# Altium PCB lay_out.PcbDoc
Units mil, origin at the board's own origin, x right, y up, seen from the top; angles counter-clockwise.
Board outline 1680 x 1250 mil, 2 copper layers (Top Layer, Bottom Layer); 15 components, 9 nets, 40 pads, 2 vias.
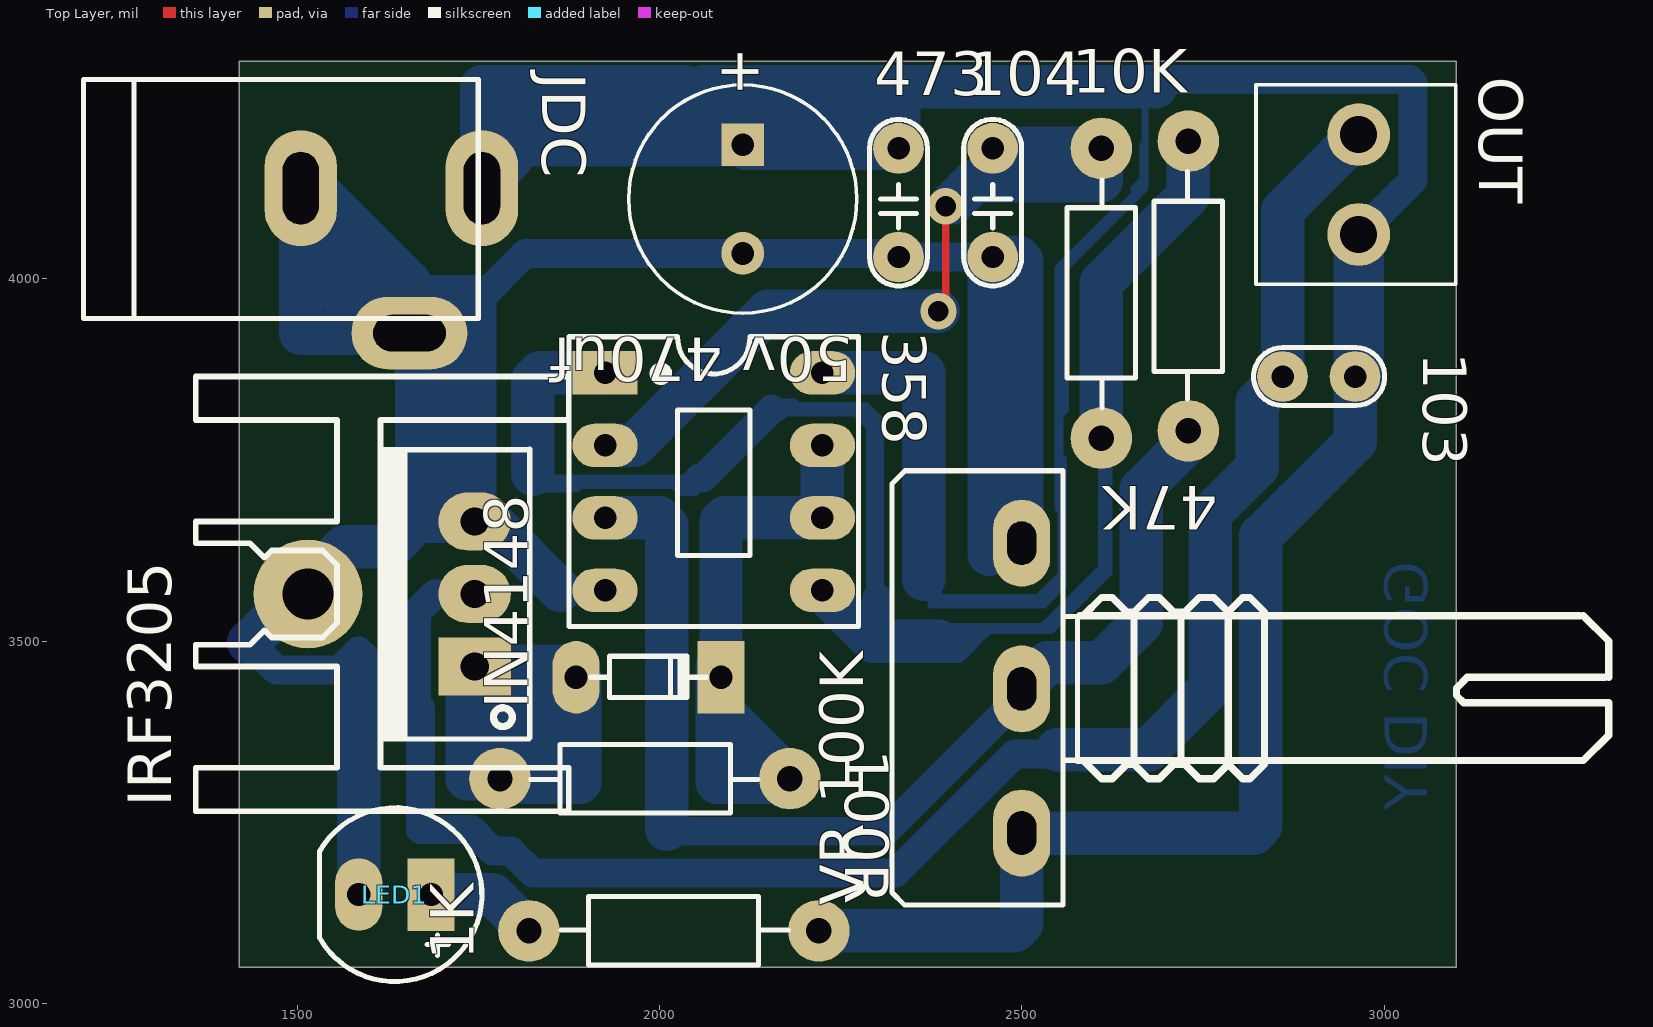
[diagram p0: Top Layer view]
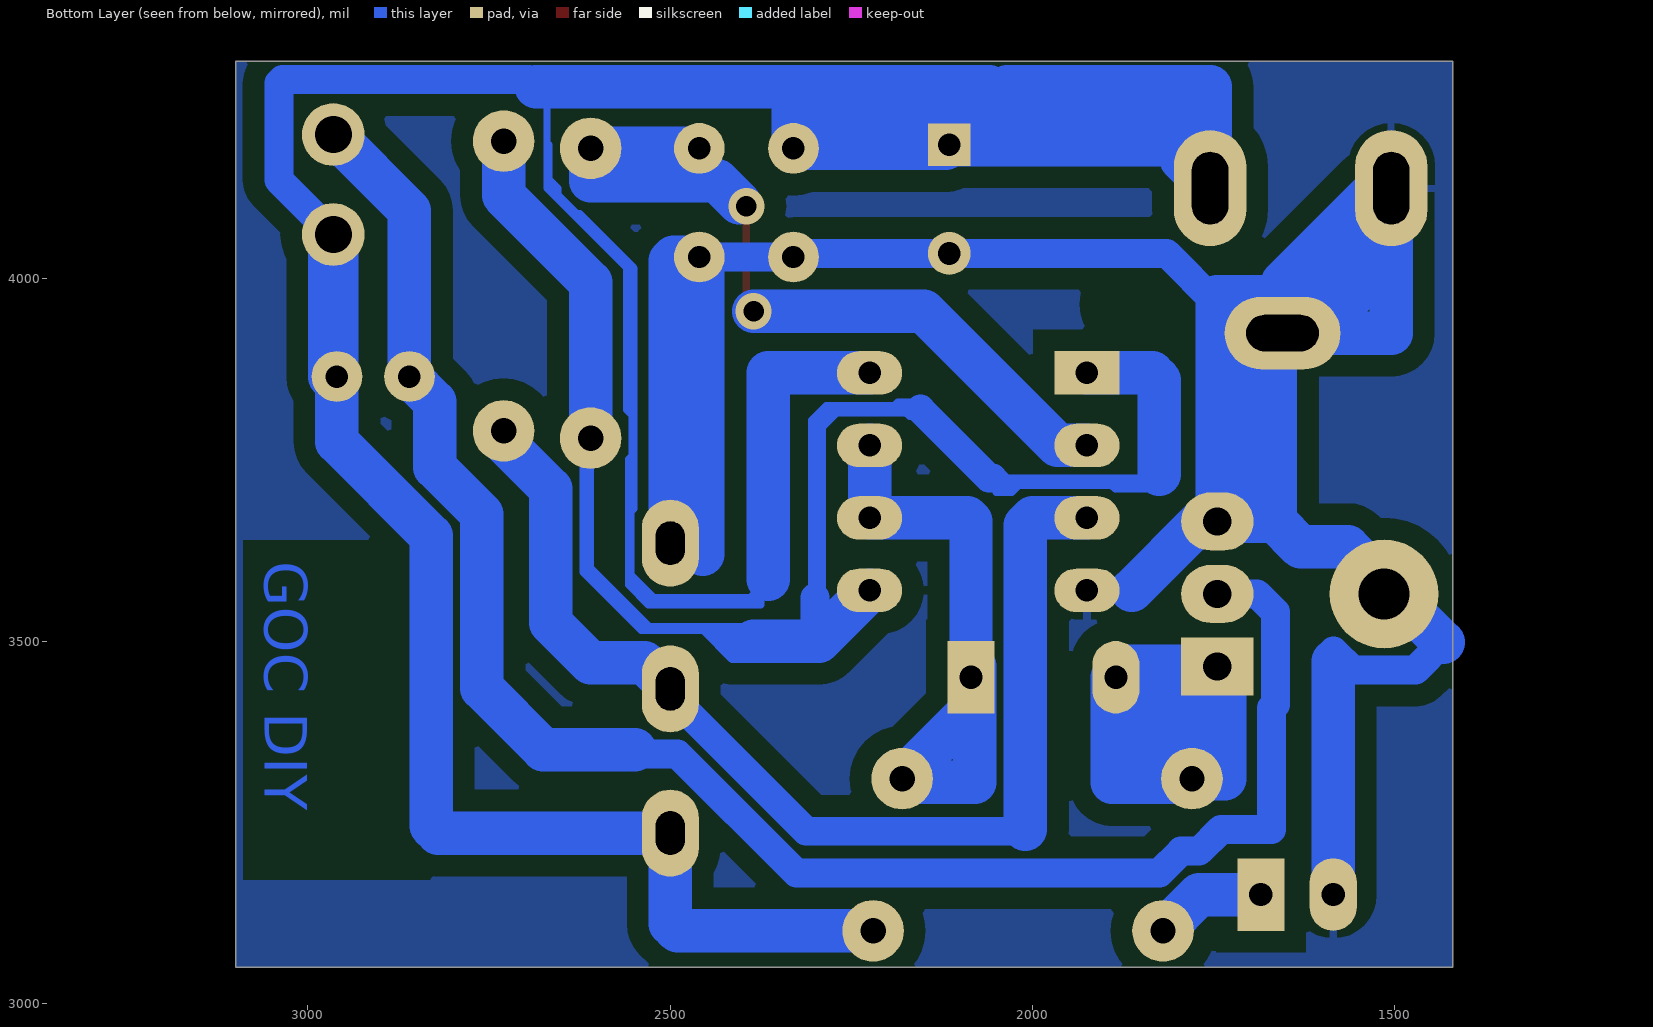
[diagram p1: Bottom Layer view, seen from below]
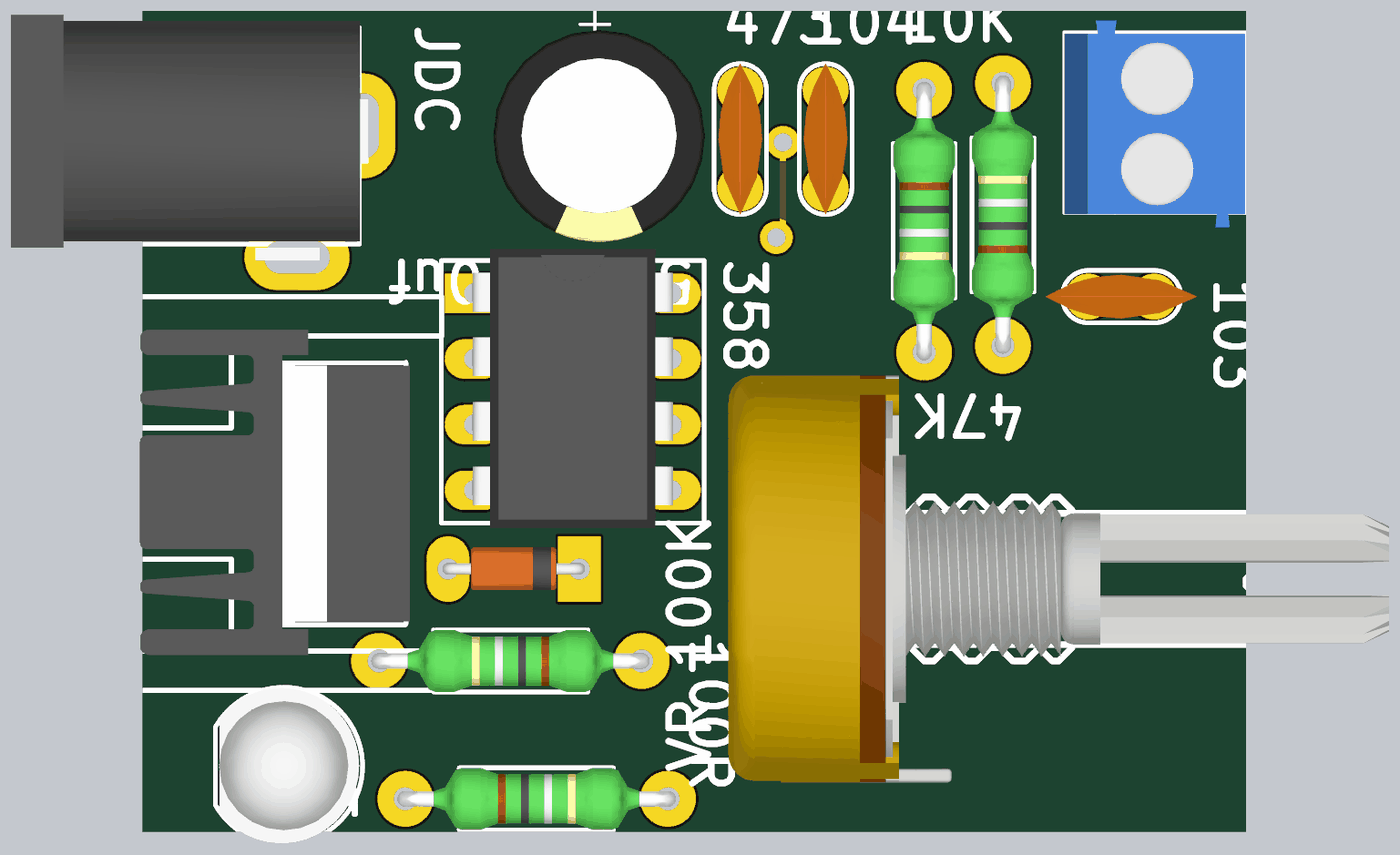
[diagram p2: 3D render of the assembled board from above, using the file's embedded part models]

## Layer stack, top to bottom
Top Solder: solder mask 0.4, Solder Resist, Dk 3.5
Top Layer: signal copper 1.4
Dielectric 1: dielectric 12.6, FR-4, Dk 4.8
Bottom Layer: signal copper 1.4
Bottom Solder: solder mask 0.4, Solder Resist, Dk 3.5

## Board outline
1420,4300 3100,4300 3100,3050 1420,3050 1420,4300

## Design rules (kind name [scope] priority, off if disabled: settings)
Clearance [All] p1: gap=30 ignorepadtopadclearanceinfootprint=FALSE except(0: Arc-Hole Track-Hole SMDPad-Hole THPad-Hole Via-Hole Fill-Hole Poly-Hole Region-Hole Text-Hole)
PolygonConnect [All] p1: connectstyle=Relief reliefconductorwidth=10 reliefentries=4 polygonreliefangle="90 Angle" airgapwidth=10
RoutingVias [All] p1: holewidth=28 width=50 viastyle="Through Hole" minholewidth=28 minwidth=50 maxholewidth=28 maxwidth=50
SolderMaskExpansion [All] p1: expansion=4
Width [All] p1: maxlimit=60 minlimit=10 preferedwidth=40
30 further rules are at their usual default settings.

## Components (designator, comment, footprint, x,y, rotation, side; value= is the part's Value field where it differs from the comment)
1K "Res" RES-1/4W 2005,3105 r180 top
10K "Res" RES-1/4W 2615,3995 r90 top
47K "Res" RES-1/4W 2725,3975 r270 top
"50v 470uf" "CN-ALU-DIP" CA-ALU-8 2115,4110 r270 top
100R "Res" RES-1/4W 1995,3305 r0 top
103 "XXpF" CN1 2910,3865 r0 top
104 "XXpF" CN1.5 2460,4100 r90 top
358 "LM358" DIP8 2075,3725 r270 top
473 "XXpF" CN1.5 2330,4100 r90 top
IN4148 "Diode" DIO-0.5A-SMALL 1985,3450 r180 top
IRF3205 "IRF9540" TO220H1 1745,3565 r90 top
JDC "Jac DC" DC0 1630,4025 r0 top
LED1 "LED" LED-5-RED 1685,3150 r180 top
OUT "KF2" KF2-3.5 2965,4130 r270 top
"VR 100K" "50K" VR-S1 2500,3435 r90 top

## Footprints (in the part's own frame and the unit in brackets; to place one, negate y for a bottom-side part, rotate by r counter-clockwise, add the part's x,y. Pads: shape width x height; smd on the part's side, far side on the other; paste and mask are expansions set on the pad)
CA-ALU-8 [mm] "Polarized capacitors, Aluminum Electrolytic Capacitors, 2-Leads, Body 8x16x3.5x0.5"
  rect 1.5x1.5 hole 0.8: 1(-1.905,0)
  round 1.5 hole 0.8: 2(1.905,0)
  silkscreen extent -4,-4 4,4, body extent -4.1,-4.1 4.1,4.1, height 14.4
CN1 [mil]
  round 70 hole 31: 1(-50,0) 2(50,0)
  silkscreen extent -90,-40 91,40, body extent -115,-33 115,33, height 265
CN1.5 [mil]
  round 70 hole 31: 1(-70,0) 2(80,0)
  silkscreen extent -110,-40 120,40, body extent -110,-33 120,33, height 235
DC0 [mil] "Jac DC input"
  oval 100x160 hole 50 slot 100 at 90 deg: 1(125,100) 2(-125,100)
  oval 160x100 hole 50 slot 100 at 0 deg: 3(25,-100)
  silkscreen extent -425,-80 120,250, body extent -410,-105 134,269, height 434
DIO-0.5A-SMALL [mil] "Diode muoi, W 80mil, L 300mil"
  oval 65x100 hole 32: 1(100,0)
  rect 65x100 hole 32: 2(-100,0)
  silkscreen extent -80,-30 80,28, body extent -108,-33 108,32, height 61
DIP8 [mil] "DIP, 8-Leads, Row Spacing 7.62mm, Pitch 2.54mm, Body 9.91x6.73mm"
  rect 60x90 hole 31: 1(-145,-150)
  oval 60x90 hole 31: 2(-45,-150) 3(55,-150) 4(155,-150) 5(155,150) 6(55,150) 7(-45,150) 8(-145,150)
  silkscreen extent -195,-200 205,200, body extent -213,-153 213,153, height 177
KF2-3.5 [mm] "3,50mm - modular - blue - Horizontal wire entry - Pressure clamp - 8,4mm height - 02p"
  round 2.2 hole 1.3: 1(-1.75,0) 2(1.75,0)
  silkscreen extent -3.5,-3.6 3.5,3.4, body extent -3.95,-3.6 4.05,3.4, height 8.41
LED-5-RED [mil] "LED 2 PIN, 5 ly , Only colour,pin to pin 100mil"
  rect 65x100 hole 32: 1(0,0)
  oval 65x100 hole 32: 2(100,0)
  silkscreen extent -70,-120 154,120, body extent -65,-119 149,118, height 339
RES-1/4W [mil]
  round 85 hole 35: 1(-215,5) 2(185,5)
  silkscreen extent -173,-42 141,52, body extent -227,-42 197,52, height 95
TO220H1 [mil] "TO-220 - 1-2-3"
  round 150 hole 70: 0(0,230)
  rect 80x100 hole 39: 1(-100,0)
  oval 80x100 hole 39: 2(0,0) 3(100,0)
  silkscreen extent -300,-130 300,385, body extent -246,-82 250,329, height 1000
VR-S1 [mil]
  oval 120x78.74 hole 40 slot 60 at 0 deg: 1(-200,0) 2(-1,0) 3(200,0)
  silkscreen extent -299,-810 300,179, body extent -310,-818 310,188, height 839

## Part data
"50v 470uf": "Capacitor (Semiconductor SIM Model)"
103 104 473: library part CN
358: "Low-Power Dual Operational Amplifier"
IN4148: "Default Diode"
IRF3205: "HEXFET P-Channel Power MOSFET"
JDC: library part DCIN, "Jac DC input"
LED1: "LED Single colour Green and Red"
"VR 100K": library part VR-S, "Var Resistor"

## Via types
v1: diameter 50, hole 28, Top Layer to Bottom Layer, 2 vias

## Nets (pads, with @x,y where several pads share a name; then routed paths per layer and width w, separated by ;. In a path a pad name is that pad's centre, name@x,y a point inside that pad or via, vN(x,y) a via of type N, cw(c..) or ccw(c..) an arc to the next point about the centre after c; other vN are vias at no path point)
GND: 104.1 358.4 473.1 "50v 470uf.2" "VR 100K.3" IRF3205.3 JDC.2 JDC.3 LED1.2 | length 5633
  Bottom Layer w40: 1433.25,3498.25 1471.51,3460 1558.49,3460 1585,3486.51 1585,3472.37 ; JDC.3 1695,3965 1730,3965 1745,3965 1815,4035 2115,4035 2325,4035 473.1 104.1
  Bottom Layer w60: 1433.25,3498.25 1565,3630 1630,3630 1665,3665 ; JDC.2 JDC.2@1510,4120 ; LED1.2 1585,3472.37 ; JDC.3@1695,3965 1705,3975 1655,3975 ; 1705,3705 1705,3775 ; 1863.14,3570 1768.14,3665 IRF3205.3 ; 2495,4030 104.1 ; 2500,4025 2500,3755 ; JDC.2@1510,4120 1655,3975 ; JDC.2@1510,4120 1505,4120 1505,3925 JDC.3@1610,3925 ; JDC.2@1510,4120 1530,4120 1655,3995 1655,3975 ; JDC.3@1610,3925 JDC.3 ; JDC.3@1610,3925 1545,3990 1550,3995 1550,4050 1595,4005 1595,3985 JDC.3 ; 1645,3975 1655,3975 ; 1645,3975 1625,3975 1615,3985 1635,3985 1645,3975 ; 1645,3975 JDC.3@1655,3965 ; JDC.3 JDC.3@1655,3965 ; JDC.3 JDC.3@1665,3915 ; JDC.3@1655,3965 1655,3975 ; 1655,3975 1730,3975 ; 1665,3665 IRF3205.3 ; 1665,3665 JDC.3@1665,3915 ; JDC.3@1665,3915 JDC.3@1700,3880 ; JDC.3@1700,3880 1705,3875 ; JDC.3@1700,3880 1700,3845 1705,3845 ; 1705,3775 1745,3815 ; 1705,3775 1705,3845 ; 1705,3845 1705,3875 ; 1705,3845 1715,3845 1725,3855 ; 1705,3875 1725,3855 ; 1725,3855 1745,3835 ; 1725,3855 1730,3860 1730,3965 1730,3975 ; 1730,3975 1745,3975 1745,3965 1745,3835 ; IRF3205.3 1745,3815 ; 1745,3815 1745,3835 ; 2455,3625 2455,3620 2460,3625 2490,3625 2500,3635 ; 2455,3625 2465,3635 2500,3635 ; 2455,3625 2455,4025 104.1 ; 104.1 2460,3795 2500,3755 ; 2500,3635 2500,3755
MT: 103.1 IRF3205.2 OUT.1 | length 2461.7
  Bottom Layer w40: IRF3205.2 1690,3565 1665,3540 1665,3412.57 1670,3407.57 1670,3240 1740,3240 1770,3210 1794.85,3210 1824.85,3180 2326,3180 2490,3344 2542.88,3344 2548.88,3350
  Bottom Layer w60: 2548.88,3350 2675,3350 2760,3435 2760,3675 2825,3740 2825,3830 103.1 2860,4093.9 OUT.1
Net1K_2: 1K.2 LED1.1 | length 155.7
  Bottom Layer w60: LED1.1 1770,3150 1K.2
Net10K_1: 10K.1 47K.1 358.1 358.5 | length 4916.4
  Bottom Layer w10: 1825,3730 1830,3725 2035,3725 ; 2154.93,3819.93 2159.93,3819.93 ; 2300,3560 2305,3555 2305,3805 2285,3825 2280,3825 ; 2385,3500 2400,3500 ; 2615,3600 2535,3520 2528.64,3520 ; 1840,3715 1891.36,3715 ; 1840,3715 1825,3715 1820,3710 1886.36,3710 1891.36,3715 ; 1840,3715 1845,3720 2030,3720 ; 1891.36,3715 2018.64,3715 ; 2018.64,3715 2025,3715 ; 2018.64,3715 2028.64,3705 2050,3705 2050,3710 2045,3715 2025,3715 ; 2025,3715 2030,3720 ; 2030,3720 2035,3725 ; 2030,3720 2050,3720 2055,3725 ; 2035,3725 2045,3735 2065,3735 ; 2035,3725 2055,3725 ; 2055,3725 2065,3735 ; 2065,3735 2070,3735 2075,3735 2155,3815 ; 2065,3735 2145,3815 2150,3815 2155,3815 ; 2155,3815 2165,3815 ; 2155,3815 2159.93,3819.93 ; 2159.93,3819.93 2160.07,3819.93 ; 2159.93,3819.93 2160,3820 ; 2160,3820 2160,3825 ; 2160,3820 2160.07,3819.93 ; 2160,3820 2155,3825 2160,3825 ; 2160,3825 2191.36,3825 ; 2160,3825 2160,3830 2186.36,3830 2191.36,3825 ; 2160.07,3819.93 2280.07,3819.93 2295,3805 ; 2160.07,3819.93 2165,3815 ; 2165,3815 2175,3815 ; 2165,3815 2170,3810 2175,3815 ; 2175,3815 2270,3815 ; 2191.36,3825 2280,3825 ; 2270,3815 2280,3815 2295,3800 ; 2270,3815 2290,3795 2290,3560 2295,3560 2295,3800 ; 2280,3825 2295,3810 2295,3805 ; 2295,3800 2295,3805 ; 2400,3475 2420,3495 ; 2400,3475 2405,3475 ; 2400,3475 2375,3475 2400,3500 ; 2400,3500 2405,3500 ; 2400,3500 2415,3515 ; 2405,3475 2415,3475 2455,3515 ; 2405,3475 2430,3500 2425,3500 ; 2405,3500 2420,3500 2425,3505 ; 2405,3500 2420,3515 ; 2405,3500 2410,3495 2420,3495 ; 2415,3515 2420,3515 ; 2415,3515 2390,3515 2395,3520 2440,3520 ; 2420,3495 2425,3500 ; 2420,3515 2430,3515 2420,3505 2425,3505 ; 2425,3500 2430,3505 ; 2425,3505 2430,3505 ; 2425,3505 2440,3520 ; 2430,3505 2435,3505 2445,3515 ; 2430,3505 2440,3515 2445,3515 ; 2440,3520 2450,3520 ; 2445,3515 2455,3515 ; 2445,3515 2450,3520 ; 2450,3520 2460,3520 ; 2455,3515 2540,3515 2620,3595 2620,3770 10K.1 2610,3601.36 2528.64,3520 ; 2455,3515 2460,3520 ; 2460,3520 2528.64,3520
  Bottom Layer w40: 2055,3725 2060,3725 2070,3735 2150,3815 2154.93,3819.93 ; 2300,3505 2300,3560
  Bottom Layer w60: 1825,3730 1825,3860 1835,3870 358.1 ; 358.5 2295,3500 2385,3500 ; 10K.1 2610,3995 2730,4115 47K.1
Net10K_2: 10K.2 104.2 358.2 | length 1098.2
  Top Layer w10: v1(2385,3955) 2395,3965 v1(2395,4100)
  Bottom Layer w60: 358.2 1965,3770 2150,3955 v1(2385,3955) ; v1@2405,4105 2435,4135 2610,4135 10K.2 104.2
Net47K_2: 47K.2 358.3 "VR 100K.2" | length 1581.5
  Bottom Layer w40: 2010,3240 2012.5,3237.5 2312.5,3237.5 2500,3425 2500,3434
  Bottom Layer w60: 358.3 2000,3670 2010,3660 2010,3240 ; 2500,3434 2536,3470 2610,3470 2665,3525 2665,3710 2730,3775 47K.2
Net100R_1: 100R.1 IN4148.1 IRF3205.1 | length 1309.6
  Bottom Layer w60: 1820,3395 1815,3390 1815,3340 1850,3340 1855,3345 1855,3380 IRF3205.1@1785,3450 ; IN4148.1 IRF3205.1@1785,3450 ; IRF3205.1 IRF3205.1@1770,3465 ; IRF3205.1 1735,3455 1735,3310 100R.1 ; IRF3205.1 1745,3345 100R.1 ; IRF3205.1@1770,3465 1875,3465 1890,3450 1890,3305 1785,3305 100R.1 ; IRF3205.1@1770,3465 IRF3205.1@1785,3450 ; 100R.1 1780,3430 1760,3450 IRF3205.1@1785,3450
Net100R_2: 100R.2 358.6 358.7 IN4148.2 | length 898.5
  Bottom Layer w60: IN4148.2@2080,3465 2080,3305 2175,3305 100R.2 2085,3405 IN4148.2 2085,3665 2090,3670 358.6 358.7
VCC: 1K.1 103.2 358.8 473.2 "50v 470uf.1" "VR 100K.1" JDC.1 OUT.2 | length 7849.4
  Bottom Layer w10: 2365,3585 2390,3560 ; 2685,4265 2670,4250 2670,4185 ; 2390,3560 2400,3550 ; 2390,3560 2375,3560 2375,3550 2400,3550 ; 2390,3560 2522.52,3560 2554.37,3591.85 ; 2400,3550 2500,3550 ; 2500,3550 2515,3550 ; 2500,3550 2505,3555 2520,3555 2515,3550 ; 2515,3550 2520,3550 ; 2520,3550 2530.36,3550 2557.68,3577.32 2557.68,3751.01 2554.37,3754.31 ; 2520,3550 2554.37,3584.37 2554.37,3591.85 ; 2552.5,3811.32 2552.5,4013.86 2628.64,4090 ; 2552.5,3811.32 2552.5,3756.18 2554.37,3754.31 ; 2552.5,3811.32 2560,3818.82 2560,4015 2670,4125 2670,4131.36 ; 2554.37,3591.85 2554.37,3650.63 ; 2554.37,3591.85 2555,3592.48 2555,3650 2554.37,3650.63 ; 2554.37,3650.63 2554.37,3678.15 ; 2554.37,3678.15 2554.37,3754.31 ; 2554.37,3678.15 2550,3682.52 2550,4015 2625,4090 2628.64,4090 ; 2628.64,4090 2655,4116.36 ; 2655,4116.36 2670,4131.36 ; 2655,4116.36 2655,4125 2667.5,4137.5 2667.5,4185 2670,4185 ; 2670,4131.36 2670,4185
  Bottom Layer w40: 2685,4265 2695,4275 3035,4275 3040,4270 3040,4136.1 OUT.2
  Bottom Layer w60: 1K.1 2490,3100 2500,3110 2500,3235 2820,3235 2830,3245 2830,3645 2960,3775 103.2 ; 358.8 2365,3870 2365,3585 ; 2310,4230 2095,4230 ; 2685,4265 2320,4265 ; JDC.1 JDC.1@1755,4175 ; JDC.1 1795,4165 1795,4185 2115,4185 ; JDC.1 1750,4120 1750,4170 JDC.1@1755,4175 ; JDC.1@1755,4175 1805,4225 1805,4230 2070,4230 ; JDC.1@1755,4175 1755,4265 1865,4265 2035,4265 2070,4230 ; 2070,4230 2115,4185 ; 2070,4230 2095,4230 ; 2095,4230 2115,4210 2115,4185 ; 2095,4230 2060,4265 2320,4265 ; 2115,4185 2120,4180 473.2 2330,4255 2320,4265 ; 103.2 2970,3865 2970,4056.1 OUT.2 2960,4056.1 103.2
pads on no net: IRF3205.0

## Polygon pours and split planes (outlines as drawn)
GND on Bottom Layer "AutoNaming" (solid, pour order 0): 1420,4300 3100,4300 3100,3050 1420,3050 1420,4300

## Other copper
Bottom Layer:
  text "GOC DIY" at 3060,3610 h59.06 r90

## Text inside footprints (layer, text, board x,y; h text height)
"50v 470uf": Top Overlay "+" at 2085.98,4319.65 h59.06 r270